# EAGLE board smd-adapter (EAGLE 6.4)
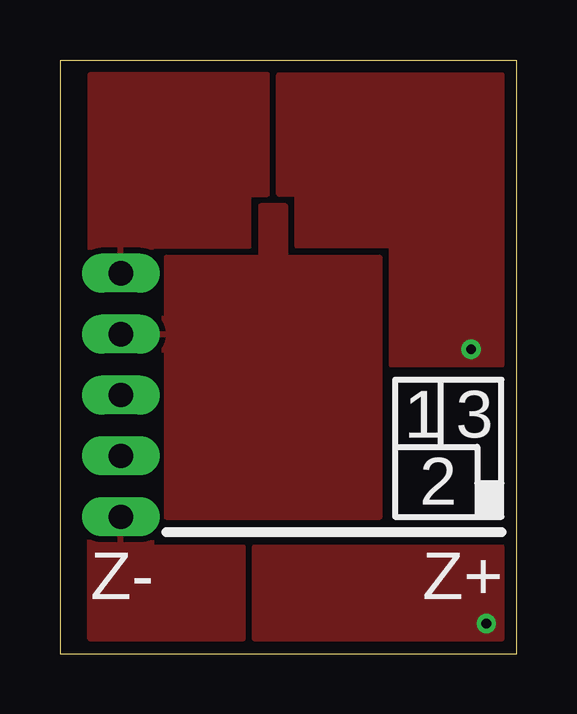
[diagram p0: board, top side]
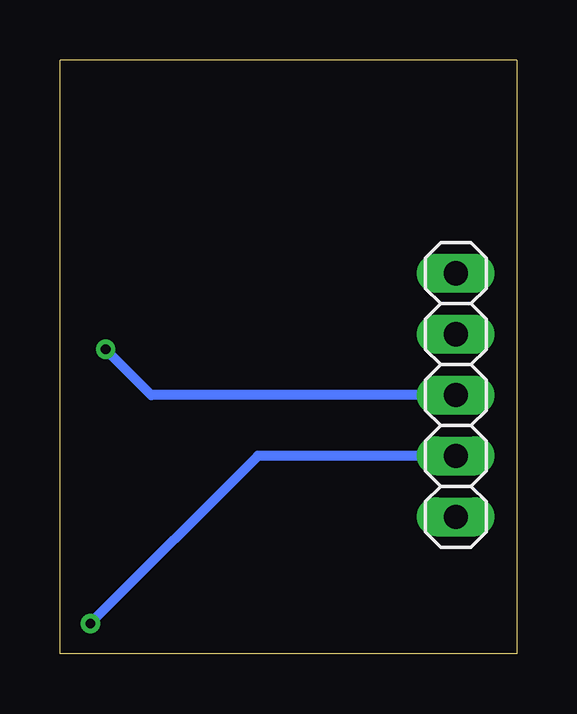
[diagram p1: board, bottom side, seen from below]

Size 19.05 x 24.76 mm. Coordinates in mm from the lower left corner, seen from the top.
Outline: 0,24.76 19.05,24.76 19.05,0 0,0 0,24.76
Copper layers (1*16): Top 0.035mm / dielectric 1.5mm / Bottom 0.035mm
Design rules "DFRobot_Eagle_Rule_v0.4": minimum track width 6mil, minimum drill 12mil, track to track 6mil, track to pad 6mil, pad to pad 6mil, via to via 6mil, smd to smd 0mil, copper to edge 10mil, drill to drill 10mil, minimum pad ring 12mil, minimum via ring 8mil, stop-mask expansion 2mil, vias tented up to drill 25mil, thermal gap 10mil

## Footprints (pad centres in the part's own frame; a part is rotated, then mirrored left to right if it is on the bottom)
TS-005 = smd 1 x 3.4: 1 -2.54,-6.6; 2 2.54,-6.6 | smd 6.8 x 9.6: 3 0,3.5
TS-003 = smd 1 x 1.6: 1 -2.28,-4.8; 2 2.28,-4.8 | smd 5.4 x 6.2: 3 0,2.5
SOT89 = smd 1 x 1.5: 1 -1.499,-1.981; 3 1.499,-1.981 | smd 1 x 2: 2 0,-1.727 | smd 2.2 x 3.7: 2@1 0,0.94
SOT23-R = smd 0.6 x 0.7: 1 -0.95,-1; 2 0.95,-1; 3 0,1
SOT223-R = smd 1.3 x 1.3: 1 -2.3,-3.05; 2 0,-3.05; 3 2.3,-3.05 | smd 3.6 x 1.3: 4 0,3.05
MELF-MLL41 = smd 1.45 x 2.6: 1 -2.445,0; 2 2.445,0
1X05 = drill 1.016 long: 1 -5.08,0; 2 -2.54,0; 3 0,0; 4 2.54,0; 5 5.08,0

## Placement (x,y rotation side)
E$1  [TS-005]  -17.78,9.53 180 top  (outside the outline)
E$2  [TS-003]  -7.62,11.05 180 top  (outside the outline)
E$3  [SOT89]  -15.24,22.22 180 top  (outside the outline)
E$4  [SOT23-R]  -21.59,21.46 180 top  (outside the outline)
E$5  [SOT223-R]  -7.62,21.21 180 top  (outside the outline)
E$6  [MELF-MLL41]  -8.26,3.17 0 top  (outside the outline)
JP5  TESTSMD  [1X05]  2.54,10.79 270 bottom

## Library data of the parts
E$1-E$4 = ref-packages-longpad
E$5 E$6 = ref-packages
JP5 = pinhead; REICHELT: AW 122/xx

## Nets
TEST1: JP5.1
TEST2: JP5.2
TEST3: JP5.3
TESTZ+: JP5.4
TESTZ-: JP5.5

## Tracks (layer width: path | path; a pad name or v marks a point on that pad's centre or on a via)
TEST1
  pour Top: 1.27,15.24 3.81,15.24 3.81,17.02 7.87,17.02 7.87,19.18 8.64,19.18 8.64,24.13 1.27,24.13
TEST2
  pour Top: 1.27,13.97 1.27,12.7 4.45,12.7 4.45,5.71 13.34,5.71 13.34,16.51 9.4,16.51 9.4,18.67 8.38,18.67 8.38,16.51 4.45,16.51 4.45,13.97
TEST3  (via drill 0.4)
  Bottom 0.406: JP5.3 15.24,10.79 v17.14,12.7
  pour Top: 13.84,17.02 9.91,17.02 9.91,19.18 9.14,19.18 9.14,24.13 18.41,24.13 18.41,12.06 13.84,12.06
TESTZ+  (via drill 0.4)
  Bottom 0.406: JP5.4 10.79,8.26 v17.78,1.27
  pour Top: 8.13,4.45 18.41,4.45 18.41,0.64 8.13,0.64
TESTZ-
  pour Top: 1.27,0.64 1.27,5.71 3.81,5.71 3.81,4.45 7.62,4.45 7.62,0.64

## Text on the board
tNames: 1 | 3 | 2 | Z- | Z+